# Altium PCB NOS_EEG_V2.PcbDoc
Units mil, origin at the board's own origin, x right, y up, seen from the top; angles counter-clockwise.
Board outline 3700 x 2300 mil, 2 copper layers (Top Layer, Bottom Layer); 44 components, 35 nets, 173 pads, 14 vias.
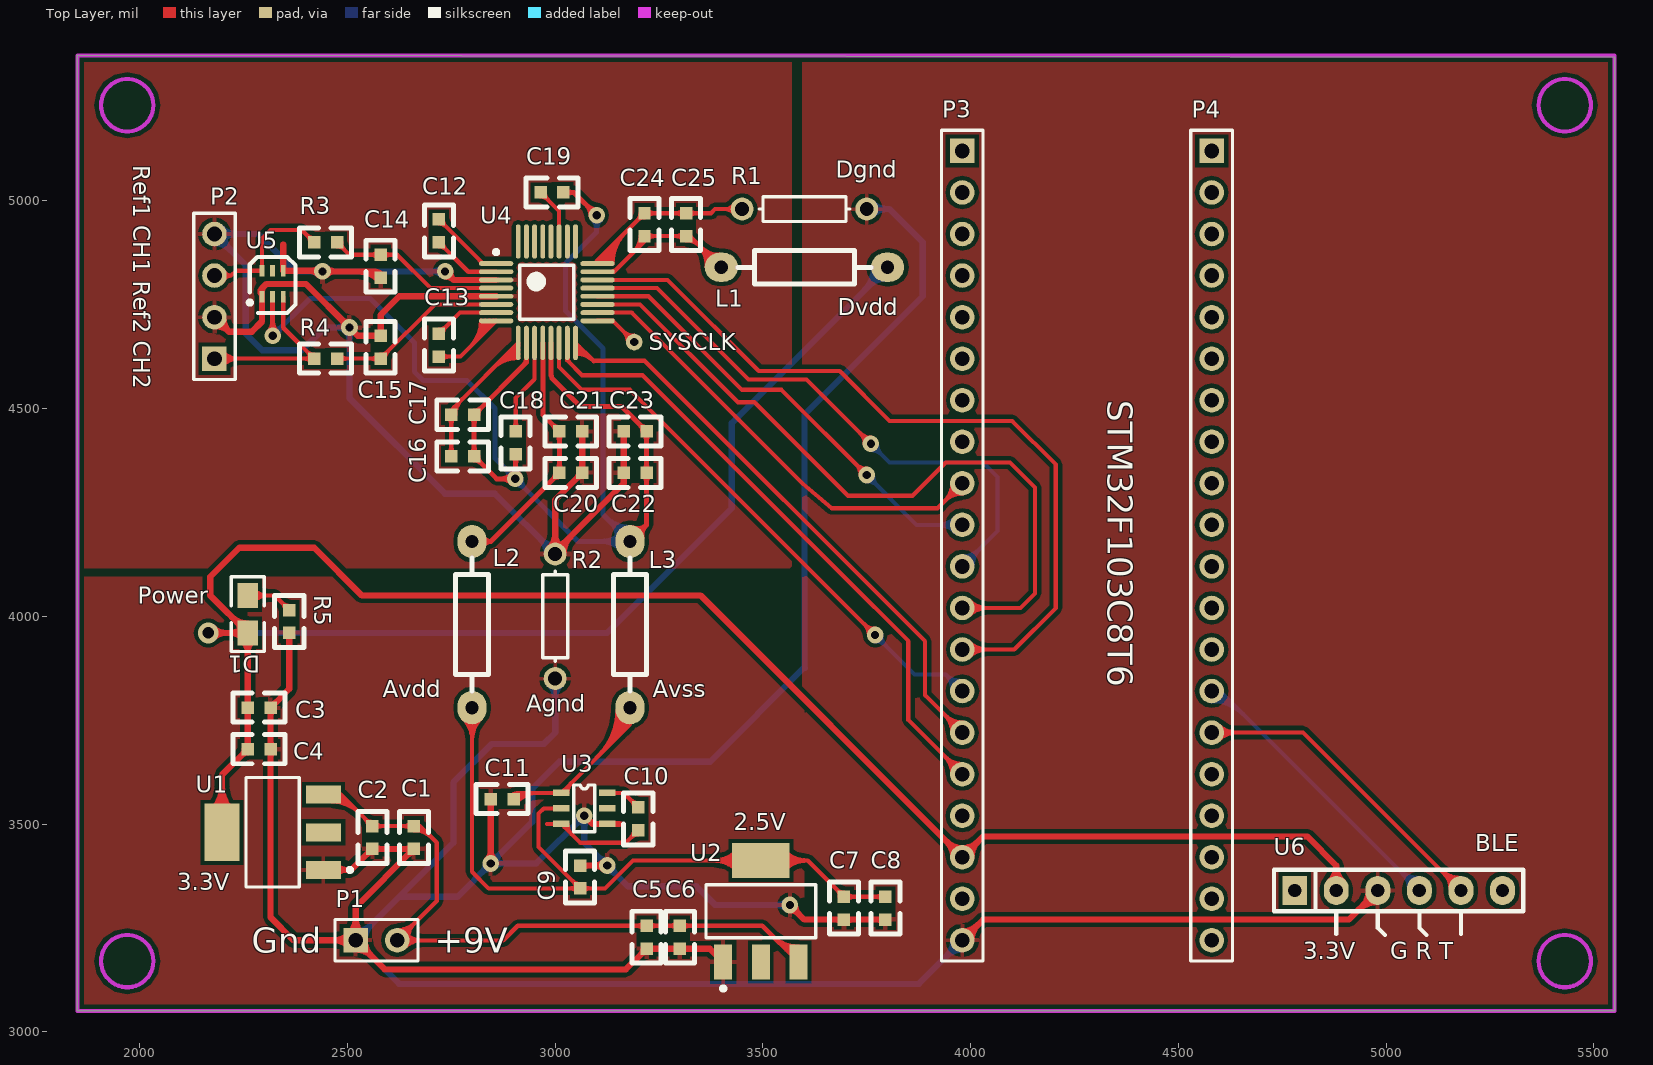
[diagram p0: Top Layer view]
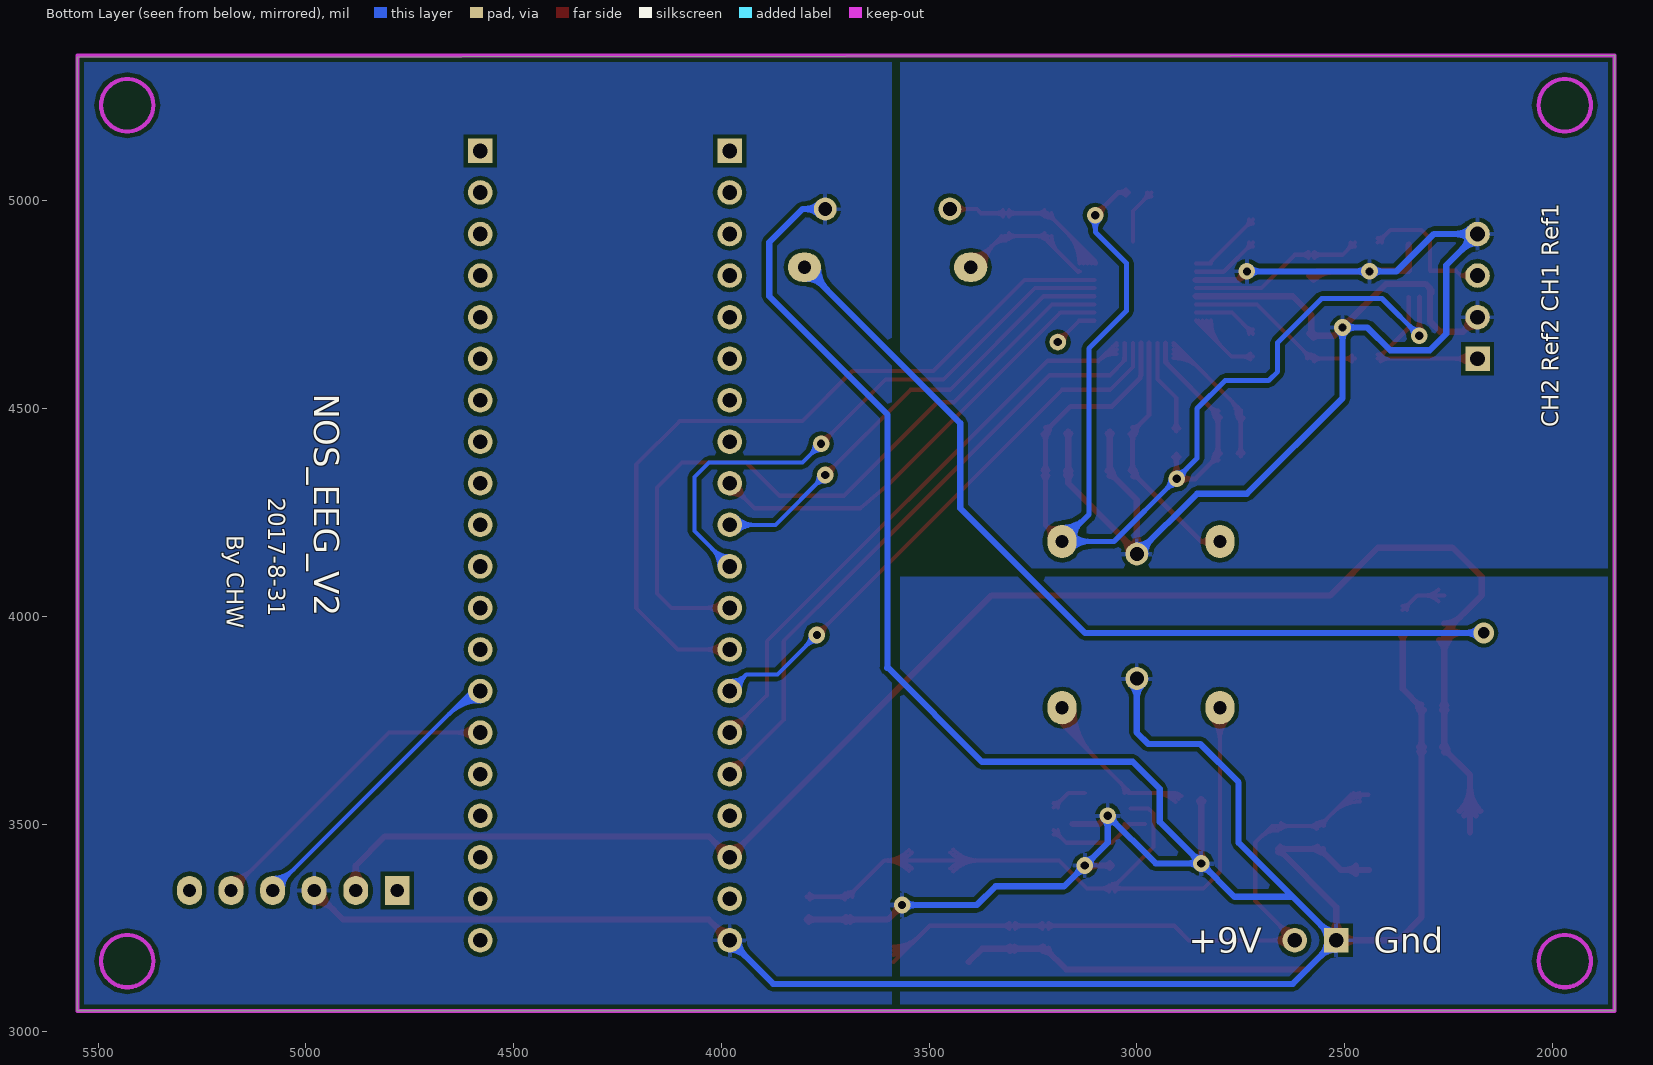
[diagram p1: Bottom Layer view, seen from below]

## Layer stack, top to bottom
Top Layer: signal copper 1.4
Dielectric: prepreg 12.6, FR-4, Dk 4.8
Bottom Layer: signal copper 1.4

## Board outline
5550,5345 5550,3050 1850,3050 1850,5350

## Design rules (kind name [scope] priority, off if disabled: settings)
Clearance [All] p1: gap=6
DiffPairsRouting [All] p1: maxlimit=15 minlimit=6 mostfreqgap=10 maxuncoupledlength=500
PolygonConnect [All] p1: connectstyle=Relief reliefconductorwidth=10 reliefentries=4 polygonreliefangle="90 Angle"
RoutingVias [All] p1: holewidth=25 width=40 viastyle="Through Hole" minholewidth=28 minwidth=50 maxholewidth=28 maxwidth=50
SolderMaskExpansion [All] p1: expansion=4
TestPointUsage [All] p1: valid=0 allowmultiple=FALSE
Testpoint [All] p1: side=15 testpointundercomponent=TRUE minsize=40 maxsize=100 preferedsize=60 minholesize=0 maxholesize=40 preferedholesize=32 testpointgrid=1 style=1023 order=0123456789
Width [All] p1: maxlimit=15 minlimit=6 preferedwidth=8 minimp=50.000000 maximp=50.000000 favimp=50.000000
18 further rules are at their usual default settings.

## Components (designator, comment, footprint, x,y, rotation, side; value= is the part's Value field where it differs from the comment)
C1 "Cap" 0603 2660,3440 r90 top
C2 "Cap" 0603 2560,3440 r90 top
C3 "Cap" 0603 2260,3780 r0 top
C4 "Cap" 0603 2260,3680 r0 top
C5 "Cap" 0603 3220,3200 r90 top
C6 "Cap" 0603 3300,3200 r90 top
C7 "Cap" 0603 3695,3325 r270 top
C8 "Cap" 0603 3795,3325 r270 top
C9 "Cap" 0603 3060,3400 r270 top
C10 "Cap" 0603 3200,3540 r270 top
C11 "Cap" 0603 2900,3560 r180 top
C12 "Cap" 0603 2720,4900 r90 top
C13 "Cap" 0603 2720,4680 r270 top
C14 "Cap" 0603 2580,4870 r270 top
C15 "Cap" 0603 2580,4620 r90 top
C16 "Cap" 0603 2805,4385 r180 top
C17 "Cap" 0603 2805,4485 r180 top
C18 "Cap" 0603 2905,4445 r270 top
C19 "Cap" 0603 3020,5020 r180 top
C20 "Cap" 0603 3065,4345 r180 top
C21 "Cap" 0603 3065,4445 r180 top
C22 "Cap" 0603 3165,4345 r0 top
C23 "Cap" 0603 3165,4445 r0 top
C24 "Cap" 0603 3215,4970 r270 top
C25 "Cap" 0603 3315,4970 r270 top
D1 "LED" 0805 2260,3960 r90 top
L1 "Inductor" AXIAL0.4 3600,4840 r180 top
L2 "Inductor" AXIAL0.4 2800,3980 r90 top
L3 "Inductor" AXIAL0.4 3180,3980 r90 top
P1 "BAT-POWER" HDR1X2 2520,3220 r0 top
P2 "INPUT" HDR1X4 2180,4620 r90 top
P3 "LEFT" HDR1X20 3980,5120 r270 top
P4 "RIGHT" HDR1X20 4580,5120 r270 top
R1 "Res1" AXIAL-0.3 3600,4980 r180 top
R2 "Res1" AXIAL-0.3 3000,4000 r90 top
R3 "Res1" 0603 2420,4900 r0 top
R4 "Res1" 0603 2420,4620 r0 top
R5 "Res1" 0603 2360,3960 r90 top
U1 "AMS1117 - 3.3V" SOT223 2320,3480 r90 top
U2 "AMS1117 - 2.5V" SOT223 3495,3290 r0 top
U3 "TPS60403" SOT23-5 3015,3575 r0 top
U4 "ADS1292" PBS32_M 2980,4780 r0 top
U5 "SMF05C" INF-SOT363_V 2320,4800 r90 top
U6 "HC-08" SIP6 4780,3340 r0 top

## Footprints (in the part's own frame and the unit in brackets; to place one, negate y for a bottom-side part, rotate by r counter-clockwise, add the part's x,y. Pads: shape width x height; smd on the part's side, far side on the other; paste and mask are expansions set on the pad)
0603 [mil]
  rect 30x30 smd: 1(0,0) 2(55,0)
  silkscreen extent -35,-35 90,35
0805 [mil]
  rect 60x50 smd: 1(0,0) 2(90,0)
  silkscreen extent -45,-40 135,40
AXIAL0.4 [mil]
  oval 80x70 hole 32: 1(-200,0) 2(200,0)
  silkscreen extent -160,-40 160,40
AXIAL-0.3 [mm] "Resistor; 2 Leads"
  round 1.4 hole 0.85: 1(-3.81,0) 2(3.81,0)
  silkscreen extent -2.77,-0.76 2.77,0.76
HDR1X2 [mm] "Connector; Header; 2 Position"
  rect 1.5x1.5 hole 0.9: 1(0,0)
  round 1.5 hole 0.9: 2(2.54,0)
  silkscreen extent -1.27,-1.27 3.81,1.27
HDR1X4 [mm] "Connector; Header; 4 Position"
  rect 1.5x1.5 hole 0.9: 1(0,0)
  round 1.5 hole 0.9: 2(2.54,0) 3(5.08,0) 4(7.62,0)
  silkscreen extent -1.27,-1.27 8.89,1.27
HDR1X20 [mm] "Connector; Header; 20 Position"
  rect 1.5x1.5 hole 0.9: 1(0,0)
  round 1.5 hole 0.9: 2(2.54,0) 3(5.08,0) 4(7.62,0) 5(10.16,0) 6(12.7,0) 7(15.24,0) 8(17.78,0) 9(20.32,0) 10(22.86,0) 11(25.4,0) 12(27.94,0) 13(30.48,0) 14(33.02,0) 15(35.56,0) 16(38.1,0) 17(40.64,0) 18(43.18,0) 19(45.72,0) 20(48.26,0)
  silkscreen extent -1.27,-1.27 49.53,1.27
INF-SOT363_V [mm] "SOT23, 6-Leads, Body 2x1.25 mm, Pitch 0.65 mm"
  rect 0.7x0.3 smd: 1(-0.8,0.65) 2(-0.8,0) 3(-0.8,-0.65) 4(0.8,-0.65) 5(0.8,0) 6(0.8,0.65)
  silkscreen extent -1.27,1.27 -1.02,1.52, body extent -0.63,-1 0.63,1, height 1
PBS32_M [mm] "32-Pin Thin Plastic Quad Flat Pack 0.5 mm Pitch, IPC Low Density"
  oval 2.1x0.3 smd: 1(-3.1,1.75) 2(-3.1,1.25) 3(-3.1,0.75) 4(-3.1,0.25) 5(-3.1,-0.25) 6(-3.1,-0.75) 7(-3.1,-1.25) 8(-3.1,-1.75) 17(3.1,-1.75) 18(3.1,-1.25) 19(3.1,-0.75) 20(3.1,-0.25) 21(3.1,0.25) 22(3.1,0.75) 23(3.1,1.25) 24(3.1,1.75)
  oval 0.3x2.1 smd: 9(-1.75,-3.1) 10(-1.25,-3.1) 11(-0.75,-3.1) 12(-0.25,-3.1) 13(0.25,-3.1) 14(0.75,-3.1) 15(1.25,-3.1) 16(1.75,-3.1) 25(1.75,3.1) 26(1.25,3.1) 27(0.75,3.1) 28(0.25,3.1) 29(-0.25,3.1) 30(-0.75,3.1) 31(-1.25,3.1) 32(-1.75,3.1)
  silkscreen extent -3.22,-1.65 1.65,2.57, body extent -2.5,-2.5 2.5,2.5, height 1.2
SIP6 [mil]
  rect 60x70 hole 32: 1(0,0)
  oval 60x70 hole 32: 2(100,0) 3(200,0) 4(300,0) 5(400,0) 6(500,0)
  silkscreen extent -50,-50 550,50
SOT23-5 [mm]
  rect 1x0.4 smd: 1(0,0) 2(0,-0.95) 3(0,-1.9) 4(2.8,-1.9) 5(2.8,-0.95) 6(2.8,0)
  silkscreen extent 0.76,-2.38 2.03,0.48
SOT223 [mm] "SOT-223/SC-73; 4 Leads; Body 6.7 x 7.3 mm, inc. leads (LxW max)"
  rect 1.1x2.15 smd: 1(-2.3,-3.1) 2(0,-3.1) 3(2.3,-3.1)
  rect 3.5x2.15 smd: 4(0,3.1)
  silkscreen extent -3.35,-4.85 3.35,1.63

## Part data
C1 C2 C3 C4 C5 C6 C7 C8 C9 C10 C11 C12 C13 C14 C15 C16 C17 C18 C19 C20 C21 C22 C23 C24 C25: "Capacitor"
D1: library part LED3, "Typical BLUE SiC LED"
P1: library part "Header 2", "Header, 2-Pin"
P2: library part "Header 4", "Header, 4-Pin"
P3 P4: library part "Header 20", "Header, 20-Pin"
R1 R2 R3 R4 R5: "Resistor"
U1 U2: library part AMS1117, "AMS1117"
U6: library part HC-05, "bluetooth"

## Free pads (board coordinates)
  round 40 hole 20: 0(3190,4660)

## Via types
v1: diameter 40, hole 20, Top Layer to Bottom Layer, 13 vias
v2: diameter 50, hole 28, Top Layer to Bottom Layer, 1 vias

## Nets (pads, with @x,y where several pads share a name; then routed paths per layer and width w, separated by ;. In a path a pad name is that pad's centre, name@x,y a point inside that pad or via, vN(x,y) a via of type N, cw(c..) or ccw(c..) an arc to the next point about the centre after c; other vN are vias at no path point)
+2.5V: C7.1 C8.1 C9.2 L2.1 U2.4 U3.2 | length 2644
  Top Layer w10: L2.1@2778.79,3753.79 cw(c2727.57,3702.57) 2800,3702.57 cw(c2872.43,3702.57) L2.1@2821.21,3753.79 ; L2.1@2785.86,3760.86 cw(c2751.72,3726.72) 2800,3726.72 cw(c2848.28,3726.72) L2.1@2814.14,3760.86 ; L2.1 2800,3385 2840,3345 C9.2 ; U3.2 2972.6,3537.6 2960,3525 2960,3445 C9.2 ; C9.2@3050,3345 ccw(c3025.86,3345) 3042.93,3362.07 ccw(c3060,3379.14) C9.2@3060,3355 ; C9.2@3052.93,3337.93 ccw(c3035.86,3320.86) 3035.86,3345 ccw(c3035.86,3369.14) C9.2@3052.93,3352.07 ; C9.2@3067.07,3337.93 cw(c3084.14,3320.86) 3084.14,3345 cw(c3084.14,3369.14) C9.2@3067.07,3352.07 ; U2.4@3442.03,3385.66 ccw(c3378.32,3321.94) 3378.32,3412.05 ccw(c3378.32,3502.15) U2.4@3442.03,3438.44 ; U2.4@3449.11,3392.73 ccw(c3402.46,3346.08) 3402.46,3412.05 ccw(c3402.46,3478.01) U2.4@3449.11,3431.37 ; U2.4@3541.47,3393.32 cw(c3584.81,3352.54) 3584.81,3412.05 cw(c3584.81,3471.55) U2.4@3541.47,3430.77 ; U2.4@3548.75,3386.47 cw(c3607.95,3330.76) 3607.95,3412.05 ; U2.4@3548.75,3437.63 ccw(c3607.95,3493.33) 3607.95,3412.05 ; C7.1@3685,3325 ccw(c3660.86,3325) 3677.93,3342.07 ccw(c3695,3359.14) C7.1@3695,3335 ; C7.1@3702.07,3317.93 cw(c3719.14,3300.86) 3719.14,3325 cw(c3719.14,3349.14) C7.1@3702.07,3332.07 ; C8.1@3787.93,3317.93 ccw(c3770.86,3300.86) 3770.86,3325 ccw(c3770.86,3349.14) C8.1@3787.93,3332.07 ; C8.1 C7.1 3607.95,3412.05 ; C9.2 3120,3345 3187.05,3412.05 U2.4 3607.95,3412.05
+3.3V: C3.1 C4.1 D1.1 L1.1 P3.18 U1.4 U6.2 | length 7107.5
  Top Layer w15: v2(2165,3960) D1.1 ; U1.4@2173.33,3531.2 ccw(c2113.88,3590.64) 2197.95,3590.64 ccw(c2282.02,3590.64) U1.4@2222.58,3531.2 ; v2@2177.37,3947.63 cw(c2207.25,3917.75) 2207.25,3960 cw(c2207.25,4002.25) v2@2177.37,3972.37 ; U1.4@2183.94,3520.59 ccw(c2150.1,3554.43) 2197.95,3554.43 ccw(c2245.81,3554.43) U1.4@2211.97,3520.59 ; U1.4 2197.95,3617.95 C4.1 C3.1 D1.1 ; 2221.59,3998.41 ccw(c2260,4036.82) D1.1@2260,3982.5 ; 2233.66,3986.34 cw(c2212.32,3965) D1.1@2242.5,3965 ; D1.1@2247.63,3942.63 cw(c2217.75,3912.75) 2260,3912.75 cw(c2302.25,3912.75) D1.1@2272.37,3942.63 ; D1.1@2247.63,3947.63 ccw(c2217.75,3917.75) 2217.75,3960 ccw(c2217.75,4002.25) D1.1@2247.63,3972.37 ; C4.1@2252.5,3680 cw(c2234.39,3680) 2247.2,3667.2 cw(c2260,3654.39) C4.1@2260,3672.5 ; C4.1@2254.7,3685.3 ccw(c2241.89,3698.11) 2260,3698.11 ccw(c2278.11,3698.11) C4.1@2265.3,3685.3 ; C3.1@2254.7,3774.7 cw(c2241.89,3761.89) 2260,3761.89 cw(c2278.11,3761.89) C3.1@2265.3,3774.7 ; C3.1@2254.7,3785.3 ccw(c2241.89,3798.11) 2260,3798.11 ccw(c2278.11,3798.11) C3.1@2265.3,3785.3 ; P3.18@3957.97,3420 ccw(c3904.79,3420) 3942.4,3457.6 ccw(c3980,3495.21) 3980,3442.03 ccw(c3980,3495.21) 4017.6,3457.6 ccw(c4055.21,3420) P3.18@4002.03,3420 ; U6.2@4864.09,3360.91 ccw(c4825.68,3399.32) 4880,3399.32 ccw(c4934.32,3399.32) U6.2@4895.91,3360.91 ; U6.2 4880,3400 4810,3470 4030,3470 P3.18 3350,4050 2535,4050 2420,4165 2240,4165 2170,4095 2170,4050 D1.1
  Bottom Layer w15: v2(2165,3960) 3125,3960 3425,4260 3425,4465 L1.1 L1.1@3785,4840 ; v2@2177.37,3947.63 cw(c2207.25,3917.75) 2207.25,3960 cw(c2207.25,4002.25) v2@2177.37,3972.37 ; 3744.52,4784.52 ccw(c3689.04,4840) L1.1@3767.5,4840 ; 3756.59,4796.59 cw(c3795,4758.18) L1.1@3795,4812.5 ; 3770.13,4810.13 ccw(c3740.25,4840) L1.1@3782.5,4840
+9V: C1.2 C2.2 C5.2 C6.2 P1.2 U1.3 U2.3 | length 2581
  Top Layer w10: U1.3 2484.45,3570.55 ; U1.3@2462.72,3553.9 cw(c2462.72,3461.23) 2528.25,3526.76 ; U1.3@2462.72,3563.9 cw(c2462.72,3495.37) 2511.17,3543.83 ; U1.3@2462.72,3573.9 cw(c2462.72,3529.51) 2494.1,3560.9 ; U1.3@2478.8,3566.22 cw(c2484.45,3564.7) 2484.45,3570.55 ; U1.3@2478.8,3574.88 ccw(c2484.45,3576.4) 2484.45,3570.55 ; C2.2@2550,3495 ccw(c2525.86,3495) 2542.93,3512.07 ccw(c2560,3529.14) C2.2@2560,3505 ; C2.2@2567.07,3487.93 cw(c2584.14,3470.86) 2584.14,3495 cw(c2584.14,3519.14) C2.2@2567.07,3502.07 ; P1.2@2620,3234.53 ccw(c2620,3269.6) 2644.8,3244.8 ccw(c2669.6,3220) P1.2@2634.53,3220 ; P1.2@2620,3244.53 ccw(c2620,3303.74) 2661.87,3261.87 ccw(c2703.74,3220) P1.2@2644.53,3220 ; P1.2@2630.27,3209.73 cw(c2655.07,3184.93) 2655.07,3220 cw(c2655.07,3255.07) P1.2@2630.27,3230.27 ; P1.2@2637.34,3202.66 cw(c2679.21,3160.79) 2679.21,3220 cw(c2679.21,3279.21) P1.2@2637.34,3237.34 ; C1.2@2652.93,3487.93 ccw(c2635.86,3470.86) 2635.86,3495 ccw(c2635.86,3519.14) C1.2@2652.93,3502.07 ; C1.2@2660,3485 cw(c2660,3424.64) 2702.68,3467.32 ; 2685.61,3484.39 ccw(c2660,3458.79) C1.2 ; C5.2@3212.93,3247.93 ccw(c3195.86,3230.86) 3195.86,3255 ccw(c3195.86,3279.14) C5.2@3212.93,3262.07 ; C5.2@3227.07,3247.93 cw(c3244.14,3230.86) 3244.14,3255 cw(c3244.14,3279.14) C5.2@3227.07,3262.07 ; C6.2@3292.93,3247.93 ccw(c3275.86,3230.86) 3275.86,3255 ccw(c3275.86,3279.14) C6.2@3292.93,3262.07 ; C6.2@3307.07,3247.93 cw(c3324.14,3230.86) 3324.14,3255 cw(c3324.14,3279.14) C6.2@3307.07,3262.07 ; 3521.84,3231.67 ccw(c3585.55,3295.38) U2.3@3585.55,3205.28 ; 3538.91,3214.6 ccw(c3585.55,3261.24) U2.3@3585.55,3195.28 ; 3555.98,3197.52 ccw(c3585.55,3227.1) U2.3@3585.55,3185.28 ; U2.3 3498.5,3255 C6.2 C5.2 2910,3255 2875,3220 P1.2 2715,3315 2715,3455 2675,3495 C1.2 ; 2484.45,3570.55 C2.2 C1.2
-2.5V: C11.1 L3.1 U3.1 | length 978.6
  Top Layer w10: C11.1@2892.93,3567.07 cw(c2912.07,3547.93) 2912.07,3575 ; C11.1@2907.07,3552.93 cw(c2960.36,3499.64) 2960.36,3575 ; 2936.21,3575 ccw(c2936.21,3523.79) C11.1 2915,3575 U3.1 3180,3740 L3.1 ; U3.1@3019.69,3575 cw(c3031,3575) 3023,3583 ; U3.1@3029.69,3575 cw(c3065.14,3575) 3040.07,3600.07 ; 3104.04,3664.04 ccw(c2993.08,3775) L3.1@3150,3775 ; 3121.11,3681.11 ccw(c3027.22,3775) L3.1@3160,3775 ; 3138.18,3698.18 ccw(c3061.36,3775) L3.1@3170,3775 ; 3155.25,3715.25 ccw(c3095.5,3775) L3.1@3180,3775 ; 3172.32,3732.32 ccw(c3129.64,3775) L3.1@3190,3775
AGND: C14.2 C15.2 C20.1 C21.1 C22.1 C23.1 P2.2 P2.4 R2.2 U4.3 U4.5 U5.1 U5.4 | length 5279.9
  Top Layer w15: P2.2 2215,4685 ; P2.2@2181.15,4698 cw(c2183.47,4653.47) 2215,4685 ; P2.2@2202,4718.85 ccw(c2246.53,4716.53) 2215,4685 ; U5.1@2292.81,4776.38 cw(c2320.43,4776.38) 2300.9,4795.9 ; U5.1@2293.09,4775.48 cw(c2302.17,4781.65) 2294.41,4789.41 ; 2345.59,4895 U5.4 2438.5,4831.5 v1(2440,4830) ; 2406.21,4831.5 cw(c2406.21,4796.21) v1@2431.16,4821.16 ; 2413.43,4831.5 ccw(c2413.43,4856.57) v1@2431.16,4838.84 ; v1@2430,4830 v1(2440,4830) ; v1@2448.84,4821.16 cw(c2470.18,4799.82) 2470.18,4830 cw(c2470.18,4860.18) v1@2448.84,4838.84 ; v1@2492.5,4695 ccw(c2462.32,4695) 2483.66,4716.34 ccw(c2505,4737.68) v1@2505,4707.5 ; 2525.68,4830 cw(c2525.68,4760.68) C14.2@2574.7,4809.7 ; 2561.89,4830 cw(c2561.89,4796.89) C14.2@2585.3,4820.3 ; C15.2@2574.7,4669.7 ccw(c2561.89,4656.89) 2561.89,4675 ccw(c2561.89,4693.11) 2574.7,4680.3 ccw(c2561.89,4693.11) 2580,4693.11 ccw(c2598.11,4693.11) C15.2@2585.3,4680.3 ; C14.2 2565,4830 v1(2440,4830) ; v1(2735,4830) 2755.47,4809.53 ; v1@2735.37,4817.51 cw(c2736.18,4790.24) 2755.47,4809.53 ; v1@2747.49,4829.63 ccw(c2774.76,4828.82) 2755.47,4809.53 ; U4.5 2624.84,4770.16 2580,4725.31 C15.2 2525,4675 v1(2505,4695) 2400,4800 2305,4800 2294.41,4789.41 ; U4.3 2755.47,4809.53 ; R2.2@2985.82,4164.18 ccw(c2951.57,4198.43) 3000,4198.43 ccw(c3048.43,4198.43) R2.2@3014.18,4164.18 ; R2.2@3000,4170.06 ccw(c3000,4206.41) 3025.71,4180.71 ; R2.2@3020.06,4150 cw(c3080.56,4150) 3037.78,4192.78 ; C20.1@3057.5,4345 cw(c3039.39,4345) 3052.2,4332.2 cw(c3065,4319.39) C20.1@3065,4337.5 ; C20.1@3059.7,4350.3 ccw(c3046.89,4363.11) 3065,4363.11 ccw(c3083.11,4363.11) C20.1@3070.3,4350.3 ; C21.1@3059.7,4439.7 cw(c3046.89,4426.89) 3065,4426.89 cw(c3083.11,4426.89) C21.1@3070.3,4439.7 ; C21.1 C20.1 3000,4280 R2.2@3000,4155 ; C22.1@3159.7,4339.7 cw(c3146.89,4326.89) 3165,4326.89 cw(c3183.11,4326.89) C22.1@3170.3,4339.7 ; C22.1@3159.7,4350.3 ccw(c3146.89,4363.11) 3165,4363.11 ccw(c3183.11,4363.11) C22.1@3170.3,4350.3 ; C23.1@3159.7,4439.7 cw(c3146.89,4426.89) 3165,4426.89 cw(c3183.11,4426.89) C23.1@3170.3,4439.7 ; C23.1 C22.1 3165,4320 R2.2@3000,4155 ; 2215,4685 2270,4685 2294.41,4709.41 U5.1 ; U5.1 2294.41,4789.41 ; U5.1 2294.41,4778.15 U5.1 ; R2.2@3000,4155 R2.2 R2.2@3000,4155
  Bottom Layer w15: P2.4@2180,4897.97 cw(c2180,4844.79) 2217.6,4882.4 cw(c2255.21,4920) P2.4@2202.03,4920 ; P2.4@2195.58,4904.42 cw(c2233.18,4866.82) 2233.18,4920 cw(c2233.18,4973.18) P2.4@2195.58,4935.58 ; v1@2431.16,4821.16 ccw(c2409.82,4799.82) 2409.82,4830 ccw(c2409.82,4860.18) v1@2431.16,4838.84 ; v1@2448.84,4821.16 cw(c2470.18,4799.82) 2470.18,4830 cw(c2470.18,4860.18) v1@2448.84,4838.84 ; v1@2496.16,4703.84 cw(c2474.82,4725.18) 2474.82,4695 cw(c2474.82,4664.82) 2496.16,4686.16 cw(c2474.82,4664.82) 2505,4664.82 cw(c2535.18,4664.82) v1@2513.84,4686.16 ; v1@2726.16,4821.16 ccw(c2704.82,4799.82) 2704.82,4830 ccw(c2704.82,4860.18) v1@2726.16,4838.84 ; v1(2735,4830) v1(2440,4830) 2375,4830 2285,4920 P2.4 2255,4845 2255,4680 2295,4640 2390,4640 2445,4695 v1(2505,4695) 2505,4525 2735,4295 2855,4295 R2.2 ; R2.2@2979.94,4150 ccw(c2931.51,4150) 2965.76,4184.24 ccw(c3000,4218.49) R2.2@3000,4170.06 ; R2.2@2995,4160 R2.2@3005,4160
AVDD: C20.2 C21.2 L2.2 U4.12 | length 791.1
  Top Layer w12: L2.2 2845,4180 ; L2.2@2826.41,4168.02 cw(c2845,4159.59) 2845,4180 ; L2.2@2826.41,4191.98 ccw(c2845,4200.41) 2845,4180 ; U4.12 2970.16,4484.84 C21.2 C20.2 2845,4180 ; C20.2@3001,4345 cw(c2979.27,4345) 2994.64,4329.64 cw(c3010,4314.27) C20.2@3010,4336 ; C21.2@3001,4445 ccw(c2979.27,4445) 2994.64,4460.36 ccw(c3010,4475.73) C21.2@3010,4454 ; C20.2@3003.64,4351.36 ccw(c2988.27,4366.73) 3010,4366.73 ccw(c3031.73,4366.73) C20.2@3016.36,4351.36 ; C21.2@3003.64,4438.64 cw(c2988.27,4423.27) 3010,4423.27 cw(c3031.73,4423.27) C21.2@3016.36,4438.64
AVSS: C16.1 C17.1 C18.2 C19.1 C22.2 C23.2 L3.2 U4.10 U4.13 U5.2 | length 4671.1
  Top Layer w12: v1@2310.1,4684.9 ccw(c2286.2,4708.8) 2320,4708.8 ccw(c2353.8,4708.8) v1@2329.9,4684.9 ; v1(2320,4675) U5.2 ; C16.1@2798.64,4391.36 ccw(c2783.27,4406.73) 2805,4406.73 ccw(c2826.73,4406.73) C16.1@2811.36,4391.36 ; C17.1@2798.64,4478.64 cw(c2783.27,4463.27) 2805,4463.27 cw(c2826.73,4463.27) C17.1@2811.36,4478.64 ; C16.1@2805,4376 cw(c2805,4354.27) 2820.36,4369.64 cw(c2835.73,4385) C16.1@2814,4385 ; C17.1@2805,4494 ccw(c2805,4515.73) 2820.36,4500.36 ccw(c2835.73,4485) C17.1@2814,4485 ; C16.1@2810,4390 C16.1 ; v1@2894.17,4321.03 ccw(c2870.27,4297.13) 2870.27,4330.93 ccw(c2870.27,4364.73) 2894.17,4340.83 ccw(c2868.01,4366.99) 2905,4366.99 ; C18.2@2898.64,4383.64 cw(c2883.27,4368.27) 2905,4368.27 cw(c2926.73,4368.27) C18.2@2911.36,4383.64 ; 2905,4362.48 ccw(c2935.61,4362.48) v1@2913.97,4340.83 ; C18.2 2905,4331.87 v1(2904.07,4330.93) 2859.07,4330.93 C16.1 ; 2922.65,4602.65 ccw(c2902.79,4622.52) U4.10@2930.88,4622.52 ; U4.10 2930.79,4610.79 C17.1 C16.1 ; U4.13@2990,4658.11 U4.13 2989.84,4580.43 2992.88,4572.12 3060,4505 3160,4505 C23.2 C22.2 3220,4220 ; C19.1 3045,5020 v1(3100,4965) ; C19.1@3026.36,5013.64 cw(c3041.73,4998.27) 3041.73,5020 cw(c3041.73,5041.73) C19.1@3026.36,5026.36 ; v1@3086,4965 ccw(c3052.2,4965) 3076.1,4988.9 ccw(c3100,5012.8) v1@3100,4979 ; L3.2 3220,4220 ; L3.2@3188.99,4212.57 ccw(c3198.44,4241.56) 3220,4220 ; L3.2@3208.82,4188.18 cw(c3247.54,4192.46) 3220,4220 ; C23.2@3211,4445 ccw(c3189.27,4445) 3204.64,4460.36 ccw(c3220,4475.73) C23.2@3220,4454 ; C22.2@3213.64,4338.64 cw(c3198.27,4323.27) 3220,4323.27 cw(c3241.73,4323.27) C22.2@3226.36,4338.64 ; C22.2@3213.64,4351.36 ccw(c3198.27,4366.73) 3220,4366.73 ccw(c3241.73,4366.73) C22.2@3226.36,4351.36 ; C23.2@3213.64,4438.64 cw(c3198.27,4423.27) 3220,4423.27 cw(c3241.73,4423.27) C23.2@3226.36,4438.64
  Bottom Layer w12: v1(2320,4675) 2410,4765 2417.5,4765 2555,4765 2661.12,4658.88 2661.12,4588.88 2682.5,4567.5 2787.5,4567.5 2855,4500 2855,4380 v1(2904.07,4330.93) 3055,4180 L3.2 3115,4245 3115,4645 3025,4735 3025,4850 3100,4925 v1(3100,4965) ; v1@2320,4689 ccw(c2320,4722.8) 2343.9,4698.9 ccw(c2367.8,4675) v1@2334,4675 ; v1@2890.07,4330.93 ccw(c2856.27,4330.93) 2880.17,4354.83 ccw(c2904.07,4378.73) v1@2904.07,4344.93 ; v1@2904.07,4316.93 cw(c2904.07,4283.13) 2927.97,4307.03 cw(c2951.87,4330.93) v1@2918.07,4330.93 ; v1@3090.1,4955.1 cw(c3066.2,4931.2) 3100,4931.2 cw(c3133.8,4931.2) v1@3109.9,4955.1 ; 3121.96,4238.04 ccw(c3180,4296.08) L3.2@3180,4214 ; 3134.03,4225.97 cw(c3093.06,4185) L3.2@3151,4185 ; 3142.44,4217.56 ccw(c3180,4255.11) L3.2@3180,4202 ; L3.2@3159.49,4159.49 ccw(c3109.99,4109.99) 3109.99,4180 ccw(c3109.99,4250.01) L3.2@3159.49,4200.51 ; L3.2@3167.98,4167.98 ccw(c3138.96,4138.96) 3138.96,4180 ccw(c3138.96,4221.04) L3.2@3167.98,4192.02
CH1: P2.3 R3.1 U5.6 | length 436
  Top Layer w10: P2.3 2220,4820 ; P2.3@2201.86,4808.88 cw(c2220,4799.65) 2220,4820 ; P2.3@2201.86,4831.12 ccw(c2220,4840.35) 2220,4820 ; U5.6@2294.41,4841.15 U5.6 ; R3.1@2410,4900 ccw(c2385.86,4900) 2402.93,4917.07 ccw(c2420,4934.14) R3.1@2420,4910 ; R3.1 2390,4930 2315,4930 2294.41,4909.41 U5.6 ; 2220,4820 2231.5,4831.5 U5.6
CH2: P2.1 R4.1 U5.3 | length 643.3
  Top Layer w10: P2.1 R4.1 2345.59,4694.41 U5.3 ; P2.1@2190.27,4609.73 cw(c2215.07,4584.93) 2215.07,4620 cw(c2215.07,4655.07) P2.1@2190.27,4630.27 ; P2.1@2197.34,4602.66 cw(c2239.21,4560.79) 2239.21,4620 cw(c2239.21,4679.21) P2.1@2197.34,4637.34 ; R4.1@2410,4620 ccw(c2385.86,4620) 2402.93,4637.07 ccw(c2420,4654.14) R4.1@2420,4630 ; R4.1@2412.93,4612.93 ccw(c2395.86,4595.86) 2395.86,4620 ccw(c2395.86,4644.14) R4.1@2412.93,4627.07
CLKSEL: P3.14 U4.14 | length 1603.3
  Top Layer w10: U4.14 3009.53,4600 3064.53,4545 3180,4545 v1(3770,3955) ; v1@3755,3955 ccw(c3718.79,3955) 3744.39,3980.61 ccw(c3770,4006.21) v1@3770,3970
  Bottom Layer w10: v1@3770,3940 cw(c3770,3903.79) 3795.61,3929.39 cw(c3821.21,3955) v1@3785,3955 ; v1(3770,3955) 3865,3860 3940,3860 ; P3.14@3955.49,3820.81 ccw(c3902.55,3822.55) 3940,3860 ; P3.14@3965.48,3820.48 ccw(c3934.13,3821.51) 3956.31,3843.69 ccw(c3978.49,3865.87) P3.14@3979.52,3834.52 ; P3.14@3979.19,3844.51 cw(c3977.45,3897.45) 3940,3860 ; P3.14 3940,3860
CS: P3.9 U4.18 | length 1243.1
  Top Layer w10: U4.18 3184.21,4730.79 3595.3,4319.7 3665.61,4260 3920,4260 P3.9 ; P3.9@3955.47,4320 cw(c3896.26,4320) 3938.13,4278.13 cw(c3980,4236.26) P3.9@3980,4295.47 ; P3.9@3965.47,4320 cw(c3930.4,4320) 3955.2,4295.2 cw(c3980,4270.4) P3.9@3980,4305.47
DGND: C24.1 C25.1 R1.2 U4.24 | length 840.6
  Top Layer w10: U4.24@3098.39,4848.9 cw(c3109.22,4848.9) 3101.56,4856.56 ; U4.24 3102.05,4857.05 C24.1 C25.1 3375,4970 3385,4980 R1.2 ; U4.24@3108.39,4848.9 cw(c3143.36,4848.9) 3118.63,4873.63 ; U4.24@3118.39,4848.9 cw(c3177.51,4848.9) 3135.7,4890.7 ; U4.24@3128.39,4848.9 cw(c3211.65,4848.9) 3152.77,4907.77 ; U4.24@3138.39,4848.9 cw(c3245.79,4848.9) 3169.84,4924.84 ; C24.1@3205,4970 cw(c3180.86,4970) 3197.93,4952.93 cw(c3215,4935.86) C24.1@3215,4960 ; C24.1@3222.07,4962.93 cw(c3239.14,4945.86) 3239.14,4970 cw(c3239.14,4994.14) C24.1@3222.07,4977.07 ; C25.1@3307.93,4962.93 ccw(c3290.86,4945.86) 3290.86,4970 ccw(c3290.86,4994.14) C25.1@3307.93,4977.07 ; C25.1@3322.07,4962.93 cw(c3339.14,4945.86) 3339.14,4970 cw(c3339.14,4994.14) C25.1@3322.07,4977.07 ; R1.2@3430.69,4968.33 ccw(c3410,4955.82) 3410,4980 ccw(c3410,5004.18) R1.2@3430.69,4991.67
DRDY: P3.13 U4.22 | length 2046.6
  Top Layer w10: U4.22 3270.47,4809.53 3490,4590 3685,4590 3805,4470 4100,4470 4205,4365 4205,4020 4105,3920 P3.13 ; P3.13@3990.27,3909.73 cw(c4015.07,3884.93) 4015.07,3920 cw(c4015.07,3955.07) P3.13@3990.27,3930.27 ; P3.13@3997.34,3902.66 cw(c4039.21,3860.79) 4039.21,3920 cw(c4039.21,3979.21) P3.13@3997.34,3937.34
DVDD: C24.2 C25.2 L1.2 U4.23 | length 720.6
  Top Layer w10: U4.23@3137.48,4830.12 ccw(c3137.48,4842.5) 3146.24,4833.74 ; U4.23@3141.7,4829.21 3215,4902.51 C24.2 ; 3189.1,4876.61 ccw(c3150.7,4915) C24.2@3205,4915 ; 3206.17,4893.68 ccw(c3184.84,4915) C24.2 ; C24.2@3222.07,4907.93 cw(c3239.14,4890.86) 3239.14,4915 cw(c3239.14,4939.14) C24.2@3222.07,4922.07 ; C25.2@3307.93,4907.93 ccw(c3290.86,4890.86) 3290.86,4915 ccw(c3290.86,4939.14) C25.2@3307.93,4922.07 ; C25.2@3315,4905 cw(c3315,4856.72) 3349.14,4890.86 ; C25.2@3325,4915 L1.2 ; 3332.07,4907.93 ccw(c3315,4890.86) C25.2 C24.2 ; 3340.25,4899.75 cw(c3280.5,4840) L1.2@3365,4840 ; 3352.32,4887.68 ccw(c3395,4930.36) L1.2@3395,4870 ; 3357.32,4882.68 cw(c3314.64,4840) L1.2@3375,4840 ; 3369.39,4870.61 ccw(c3395,4896.21) L1.2@3395,4860
GND: C1.1 C2.1 C3.2 C4.2 C5.1 C6.1 C7.2 C8.2 C9.1 C11.2 P1.1 P3.20 R1.1 R2.1 R5.1 U1.1 U2.1 U3.4 U6.3 | length 11821.1
  Top Layer w15: C4.2@2309.7,3674.7 cw(c2296.89,3661.89) 2315,3661.89 cw(c2333.11,3661.89) C4.2@2320.3,3674.7 ; C4.2@2309.7,3685.3 ccw(c2296.89,3698.11) 2315,3698.11 ccw(c2333.11,3698.11) C4.2@2320.3,3685.3 ; C3.2@2309.7,3774.7 cw(c2296.89,3761.89) 2315,3761.89 cw(c2333.11,3761.89) C3.2@2320.3,3774.7 ; C3.2@2315,3787.5 ccw(c2315,3805.61) 2327.8,3792.8 ccw(c2340.61,3780) C3.2@2322.5,3780 ; R5.1@2354.7,3954.7 cw(c2341.89,3941.89) 2360,3941.89 cw(c2378.11,3941.89) R5.1@2365.3,3954.7 ; R5.1 2360,3825 C3.2 C4.2 2315,3275 2370,3220 P1.1 ; U1.1 2509.45,3389.45 C2.1 C1.1 2520,3300 P1.1 ; U1.1@2472.72,3379.44 cw(c2496.89,3355.28) 2496.89,3389.45 cw(c2496.89,3423.62) U1.1@2472.72,3399.46 ; P1.1@2504.42,3204.42 ccw(c2466.82,3166.82) 2466.82,3220 ccw(c2466.82,3273.18) 2504.42,3235.58 ccw(c2466.82,3273.18) 2520,3273.18 ccw(c2573.18,3273.18) P1.1@2535.58,3235.58 ; P1.1@2520,3197.97 cw(c2520,3144.79) 2557.6,3182.4 cw(c2595.21,3220) P1.1@2542.03,3220 ; C2.1@2552.5,3440 cw(c2534.39,3440) 2547.2,3427.2 cw(c2560,3414.39) C2.1@2560,3432.5 ; C2.1@2565.3,3434.7 cw(c2578.11,3421.89) 2578.11,3440 cw(c2578.11,3458.11) C2.1@2565.3,3445.3 ; C1.1@2652.5,3440 cw(c2634.39,3440) 2647.2,3427.2 cw(c2660,3414.39) C1.1@2660,3432.5 ; C1.1@2654.7,3434.7 ccw(c2641.89,3421.89) 2641.89,3440 ccw(c2641.89,3458.11) C1.1@2654.7,3445.3 ; v1@2836.16,3413.84 ccw(c2814.82,3435.18) 2845,3435.18 ccw(c2875.18,3435.18) v1@2853.84,3413.84 ; C11.2@2839.7,3554.7 cw(c2826.89,3541.89) 2845,3541.89 cw(c2863.11,3541.89) C11.2@2850.3,3554.7 ; v1(2845,3405) C11.2 ; C9.1 v1(3125,3400) ; C9.1@3065.3,3394.7 cw(c3078.11,3381.89) 3078.11,3400 cw(c3078.11,3418.11) C9.1@3065.3,3405.3 ; v1(3070,3520) 3089.8,3500.2 U3.4 3154.8,3500.2 3155,3500 ; v1@3116.16,3391.16 ccw(c3094.82,3369.82) 3094.82,3400 ccw(c3094.82,3430.18) v1@3116.16,3408.84 ; C5.1@3212.5,3200 cw(c3194.39,3200) 3207.2,3187.2 cw(c3220,3174.39) C5.1@3220,3192.5 ; C5.1@3225.3,3194.7 cw(c3238.11,3181.89) 3238.11,3200 cw(c3238.11,3218.11) C5.1@3225.3,3205.3 ; C6.1@3294.7,3194.7 ccw(c3281.89,3181.89) 3281.89,3200 ccw(c3281.89,3218.11) C6.1@3294.7,3205.3 ; C6.1@3305.3,3194.7 cw(c3318.11,3181.89) 3318.11,3200 cw(c3318.11,3218.11) C6.1@3305.3,3205.3 ; U2.1 3372.4,3200 C6.1 C5.1 3170,3150 2590,3150 P1.1 ; v1@3565,3292.5 cw(c3565,3262.32) 3586.34,3283.66 cw(c3607.68,3305) v1@3577.5,3305 ; v1(3565,3305) 3600,3270 C7.2 C8.2 ; C7.2@3689.7,3264.7 ccw(c3676.89,3251.89) 3676.89,3270 ccw(c3676.89,3288.11) C7.2@3689.7,3275.3 ; C7.2@3700.3,3264.7 cw(c3713.11,3251.89) 3713.11,3270 cw(c3713.11,3288.11) C7.2@3700.3,3275.3 ; C8.2@3789.7,3264.7 ccw(c3776.89,3251.89) 3776.89,3270 ccw(c3776.89,3288.11) C8.2@3789.7,3275.3 ; P3.20 4030,3270 4910,3270 U6.3 ; P3.20@3980,3242.03 ccw(c3980,3295.21) 4017.6,3257.6 ccw(c4055.21,3220) P3.20@4002.03,3220 ; 4933.05,3293.05 cw(c4980,3246.11) U6.3@4980,3312.5 ; 4945.13,3305.13 ccw(c4915.25,3335) U6.3@4957.5,3335
  Bottom Layer w15: P1.1@2517.41,3217.41 P1.1 ; P1.1@2520,3197.97 cw(c2520,3144.79) 2557.6,3182.4 cw(c2595.21,3220) 2542.03,3220 cw(c2595.21,3220) 2557.6,3257.6 cw(c2520,3295.21) P1.1@2520,3242.03 ; v1@2832.5,3405 cw(c2802.32,3405) 2823.66,3383.66 cw(c2845,3362.32) v1@2845,3392.5 ; v1@2845,3417.5 ccw(c2845,3447.68) 2866.34,3426.34 ccw(c2887.68,3405) v1@2857.5,3405 ; v1@2853.84,3396.16 cw(c2875.18,3374.82) 2875.18,3405 cw(c2875.18,3435.18) v1@2853.84,3413.84 ; R2.1@2985.82,3835.82 cw(c2951.57,3801.57) 3000,3801.57 cw(c3048.43,3801.57) R2.1@3014.18,3835.82 ; R2.1 3000,3720 2972.5,3692.5 2847.5,3692.5 2755,3600 2755,3455 2625,3325 ; v1@3057.5,3520 cw(c3027.32,3520) 3048.66,3498.66 cw(c3070,3477.32) v1@3070,3507.5 ; v1@3061.16,3511.16 cw(c3039.82,3489.82) 3070,3489.82 cw(c3100.18,3489.82) v1@3078.84,3511.16 ; v1@3112.5,3400 ccw(c3082.32,3400) 3103.66,3421.34 ccw(c3125,3442.68) v1@3125,3412.5 ; v1@3125,3387.5 cw(c3125,3357.32) 3146.34,3378.66 cw(c3167.68,3400) v1@3137.5,3400 ; v1@3556.16,3296.16 ccw(c3534.82,3274.82) 3534.82,3305 ccw(c3534.82,3335.18) v1@3556.16,3313.84 ; v1(3565,3305) 3385,3305 3340,3350 3175,3350 v1(3125,3400) 3070,3455 v1(3070,3520) 2955,3405 v1(2845,3405) ; 3601.03,3876.03 3600,3877.05 ; R1.1 3805,4980 3885,4900 3885,4770 3600,4485 3600,3877.05 ; R1.1@3764.18,4965.82 cw(c3798.43,4931.57) 3798.43,4980 cw(c3798.43,5028.43) R1.1@3764.18,4994.18 ; P3.20@3957.97,3220 cw(c3904.79,3220) 3942.4,3182.4 cw(c3980,3144.79) P3.20@3980,3197.97 ; P3.20 3875,3115 2625,3115 P1.1 ; P1.1 2625,3325 ; 2625,3325 2765,3325 v1(2845,3405) ; v1(2845,3405) 2945,3505 2945,3585 3010,3650 3372.95,3650 3600,3877.05
MISO: P3.11 U4.21 | length 1663.4
  Top Layer w10: U4.21 3245.16,4789.84 3465,4570 3605,4570 v1(3760,4415) ; v1@3745,4415 ccw(c3708.79,4415) 3734.39,4440.61 ccw(c3760,4466.21) v1@3760,4430
  Bottom Layer w10: v1@3760,4400 cw(c3760,4363.79) 3785.61,4389.39 cw(c3811.21,4415) v1@3775,4415 ; v1(3760,4415) 3805,4370 4030,4370 4065,4335 4065,4205 P3.11 ; P3.11@3980,4134.53 ccw(c3980,4169.6) 4004.8,4144.8 ccw(c4029.6,4120) P3.11@3994.53,4120 ; P3.11@3980,4144.53 ccw(c3980,4203.74) 4021.87,4161.87 ccw(c4063.74,4120) P3.11@4004.53,4120
MOSI: P3.12 U4.19 | length 1894.3
  Top Layer w10: U4.19 3204.53,4750.47 3440,4515 3480,4515 3705,4290 3860,4290 3940,4370 4095,4370 4155,4310 4155,4055 4120,4020 P3.12 ; P3.12@3990.27,4009.73 cw(c4015.07,3984.93) 4015.07,4020 cw(c4015.07,4055.07) P3.12@3990.27,4030.27 ; P3.12@3997.34,4002.66 cw(c4039.21,3960.79) 4039.21,4020 cw(c4039.21,4079.21) P3.12@3997.34,4037.34
NetC10_1: C10.1 U3.6 | length 127.2
  Top Layer w10: U3.6 3165,3575 C10.1 ; C10.1@3190,3540 ccw(c3165.86,3540) 3182.93,3557.07 ccw(c3200,3574.14) C10.1@3200,3550
NetC10_2: C10.2 U3.3 | length 325.9
  Top Layer w10: 2980,3500 2980.2,3500.2 U3.3 3060.2,3455 3170,3455 C10.2 ; U3.3@3019.69,3500.2 ccw(c3031,3500.2) 3023,3492.2 ; U3.3@3029.69,3500.2 ccw(c3065.14,3500.2) 3040.07,3475.13 ; C10.2@3190,3485 cw(c3165.86,3485) 3182.93,3467.93 cw(c3200,3450.86) C10.2@3200,3475
NetC12_1: C12.1 U4.2 | length 205.2
  Top Layer w10: C12.1@2720,4890 cw(c2720,4865.86) 2737.07,4882.93 cw(c2754.14,4900) C12.1@2730,4900 ; C12.1 2790.79,4829.21 U4.2
NetC12_2: C12.2 U4.1 | length 228.3
  Top Layer w10: C12.2@2720,4945 cw(c2720,4920.86) 2737.07,4937.93 cw(c2754.14,4955) C12.2@2730,4955 ; C12.2 2826.1,4848.9 U4.1 ; 2818.44,4856.56 cw(c2810.78,4848.9) U4.1@2821.61,4848.9
NetC13_1: C13.1 U4.7 | length 196.9
  Top Layer w10: C13.1 2770.79,4730.79 U4.7 ; C13.1@2720,4690 ccw(c2720,4714.14) 2737.07,4697.07 ccw(c2754.14,4680) C13.1@2730,4680
NetC13_2: C13.2 U4.8 | length 373.4
  Top Layer w10: C13.2 2771.85,4625 U4.8 ; C13.2@2727.07,4617.93 cw(c2744.14,4600.86) 2744.14,4625 cw(c2744.14,4649.14) C13.2@2727.07,4632.07 ; 2795.92,4649.07 ccw(c2733.89,4711.1) U4.8@2821.61,4711.1 ; 2812.99,4666.14 ccw(c2768.03,4711.1) U4.8@2831.61,4711.1 ; 2830.06,4683.21 ccw(c2802.17,4711.1) U4.8@2841.61,4711.1 ; 2847.13,4700.28 ccw(c2836.31,4711.1) U4.8@2851.61,4711.1
NetC14_1: C14.1 R3.2 U4.4 | length 542.3
  Top Layer w10: R3.2@2475,4890 cw(c2475,4865.86) 2492.07,4882.93 cw(c2509.14,4900) R3.2@2485,4900 ; R3.2 2505,4870 C14.1 2620,4870 2700.16,4789.84 U4.4 ; C14.1@2572.93,4862.93 ccw(c2555.86,4845.86) 2555.86,4870 ccw(c2555.86,4894.14) C14.1@2572.93,4877.07 ; C14.1@2587.07,4862.93 cw(c2604.14,4845.86) 2604.14,4870 cw(c2604.14,4894.14) C14.1@2587.07,4877.07
NetC15_1: C15.1 R4.2 U4.6 | length 550.8
  Top Layer w10: R4.2 C15.1 2710.47,4750.47 U4.6 ; R4.2@2482.07,4612.93 cw(c2499.14,4595.86) 2499.14,4620 cw(c2499.14,4644.14) R4.2@2482.07,4627.07 ; C15.1@2572.93,4612.93 ccw(c2555.86,4595.86) 2555.86,4620 ccw(c2555.86,4644.14) C15.1@2572.93,4627.07 ; C15.1@2580,4630 ccw(c2580,4654.14) 2597.07,4637.07 ccw(c2614.14,4620) C15.1@2590,4620
NetC16_2: C16.2 C17.2 U4.9 | length 641.3
  Top Layer w10: C16.2@2742.93,4392.07 ccw(c2725.86,4409.14) 2750,4409.14 ccw(c2774.14,4409.14) C16.2@2757.07,4392.07 ; C17.2@2742.93,4477.93 cw(c2725.86,4460.86) 2750,4460.86 cw(c2774.14,4460.86) C17.2@2757.07,4477.93 ; C16.2 C17.2 ; 2758.38,4505.23 ccw(c2778.61,4485) C17.2 ; C17.2@2760,4485 cw(c2812.75,4485) 2775.45,4522.3 ; 2849.07,4595.92 cw(c2911.1,4533.89) U4.9@2911.1,4621.61 ; 2866.14,4612.99 cw(c2911.1,4568.03) U4.9@2911.1,4631.61 ; 2883.21,4630.06 cw(c2911.1,4602.17) U4.9@2911.1,4641.61 ; 2900.28,4647.13 cw(c2911.1,4636.31) U4.9@2911.1,4651.61 ; U4.9 2750,4496.85 C17.2
NetC18_1: C18.1 U4.11 | length 269.7
  Top Layer w10: C18.1@2897.93,4452.07 ccw(c2880.86,4469.14) 2905,4469.14 ccw(c2929.14,4469.14) C18.1@2912.07,4452.07 ; C18.1 2905,4525 2950.47,4570.47 U4.11
NetC19_2: C19.2 U4.27 | length 174.3
  Top Layer w10: C19.2@2965,5010 cw(c2965,4985.86) 2982.07,5002.93 cw(c2999.14,5020) C19.2@2975,5020 ; C19.2 3009.53,4975.47 U4.27
NetD1_2: D1.2 R5.2 | length 228.3
  Top Layer w10: D1.2 2325,4050 R5.2 ; D1.2@2274.14,4035.86 cw(c2308.28,4001.72) 2308.28,4050 cw(c2308.28,4098.28) D1.2@2274.14,4064.14 ; R5.2@2350,4015 ccw(c2325.86,4015) 2342.93,4032.07 ccw(c2360,4049.14) R5.2@2360,4025
RESET: P3.16 U4.15 | length 1679.3
  Top Layer w10: U4.15 3029.21,4615.79 3065,4580 3210,4580 3690,4100 3850,3940 3850,3750 P3.16 ; U4.15@3030.12,4622.52 ccw(c3048.56,4622.52) 3035.52,4609.48 ; P3.16@3955.47,3620 ccw(c3896.26,3620) 3938.13,3661.87 ccw(c3980,3703.74) P3.16@3980,3644.53 ; P3.16@3965.47,3620 ccw(c3930.4,3620) 3955.2,3644.8 ccw(c3980,3669.6) P3.16@3980,3634.53
RXD: P4.14 U6.4 | length 1028
  Bottom Layer w10: P4.14@4580,3795.47 cw(c4580,3687.97) 4656.01,3763.99 ; P4.14@4580,3805.47 cw(c4580,3722.12) 4638.94,3781.06 ; P4.14@4580,3815.47 cw(c4580,3756.26) 4621.87,3798.13 ; P4.14 4600,3820 U6.4 ; 5028.79,3391.21 ccw(c5080,3442.43) U6.4@5080,3370 ; 5040.86,3379.14 cw(c5006.72,3345) U6.4@5055,3345 ; 5045.86,3374.14 ccw(c5080,3408.28) U6.4@5080,3360
SCLK: P3.10 U4.20 | length 1367.7
  Top Layer w10: U4.20 3224.84,4770.16 3450,4545 3545,4545 v1(3750,4340) ; v1@3735,4340 ccw(c3698.79,4340) 3724.39,4365.61 ccw(c3750,4391.21) v1@3750,4355
  Bottom Layer w10: v1@3750,4325 cw(c3750,4288.79) 3775.61,4314.39 cw(c3801.21,4340) v1@3765,4340 ; v1(3750,4340) 3870,4220 P3.10 ; P3.10@3962.66,4202.66 ccw(c3920.79,4160.79) 3920.79,4220 ccw(c3920.79,4279.21) P3.10@3962.66,4237.34 ; P3.10@3969.73,4209.73 ccw(c3944.93,4184.93) 3944.93,4220 ccw(c3944.93,4255.07) P3.10@3969.73,4230.27
START: P3.15 U4.16 | length 1636.9
  Top Layer w10: U4.16@3048.25,4651.61 cw(c3048.6,4635.59) 3059.93,4646.92 ; U4.16@3048.47,4641.61 cw(c3049.33,4603.23) 3076.48,4630.37 ; U4.16@3048.69,4631.61 cw(c3050.05,4570.86) 3093.02,4613.83 ; U4.16 3091.85,4615 3215,4615 3890,3940 3890,3810 P3.15 ; P3.15@3955.47,3720 ccw(c3896.26,3720) 3938.13,3761.87 ccw(c3980,3803.74) P3.15@3980,3744.53 ; P3.15@3965.47,3720 ccw(c3930.4,3720) 3955.2,3744.8 ccw(c3980,3769.6) P3.15@3980,3734.53
SYSCLK: pad.0 U4.17 | length 187.9
  Top Layer w10: U4.17@3123.9,4711.1 U4.17 3138.9,4711.1 pad.0 ; pad.0@3175,4660 ccw(c3138.79,4660) 3164.39,4685.61 ccw(c3190,4711.21) pad.0@3190,4675
TXD: P4.15 U6.5 | length 1038.2
  Top Layer w10: P4.15 4800,3720 U6.5 ; P4.15@4590.27,3709.73 cw(c4615.07,3684.93) 4615.07,3720 cw(c4615.07,3755.07) P4.15@4590.27,3730.27 ; P4.15@4597.34,3702.66 cw(c4639.21,3660.79) 4639.21,3720 cw(c4639.21,3779.21) P4.15@4597.34,3737.34 ; 5128.79,3391.21 ccw(c5180,3442.43) U6.5@5180,3370 ; 5140.86,3379.14 cw(c5106.72,3345) U6.5@5155,3345 ; 5145.86,3374.14 ccw(c5180,3408.28) U6.5@5180,3360
pads on no net: P3.1 P3.2 P3.3 P3.4 P3.5 P3.6 P3.7 P3.8 P3.17 P3.19 P4.1 P4.2 P4.3 P4.4 P4.5 P4.6 P4.7 P4.8 P4.9 P4.10 P4.11 P4.12 P4.13 P4.16 P4.17 P4.18 P4.19 P4.20 U1.2 U2.2 U3.5 U4.25 U4.26 U4.28 U4.29 U4.30 U4.31 U4.32 U5.5 U6.1 U6.6

## Polygon pours and split planes (outlines as drawn)
AGND on Top Layer "Top Layer-No Net" (solid, remove dead copper, pour order 1002): 1850,5350 3570,5350 3570,4120 3565,4115 1850,4115 1850,5350
GND on Top Layer "Top Layer-No Net" (solid, remove dead copper, pour order 1001): 1850,3050 1850,4095 3600,4095 3600,3050 1850,3050
GND on Top Layer "Top Layer-No Net" (solid, remove dead copper, pour order 1000): 5550,5350 5550,3050 3595,3050 3595,5350
GND on Bottom Layer "Top Layer-No Net" (solid, remove dead copper, pour order 1005): 3595,5350 5550,5350 5550,3050 3590,3050 3590,5345 3595,5350
GND on Bottom Layer "Top Layer-No Net" (solid, remove dead copper, pour order 1004): 1865,4095 3570,4095 3570,3050 1865,3050 1865,4095
AGND on Bottom Layer "Top Layer-No Net" (solid, remove dead copper, pour order 1003): 3570,5335 3570,4115 1865,4115 1865,5335 3570,5335

## Keep-outs
Keep-Out Layer:
  circle w10: c5430,3170 r62.99
  circle w10: c5430,5230 r62.99
  circle w10: c1970,5230 r62.99
  circle w10: c1970,3170 r62.99
  lines w10: 1850,3050 1850,5350 5550,5350 5550,4775 5550,3625 5550,3050 1850,3050

## Silkscreen, mask and mechanical layers (free items; w line width, h text height)
Top Overlay:
  lines w10: 2265,4780 2265,4847.13 2282.87,4865 2355,4865 2375,4845 2375,4750 2355,4730 2285,4730 ; 4880,3235 4880,3290 ; 4980,3290 4980,3250 4997.5,3232.5 ; 5080,3290 5080,3250 5097.5,3232.5 ; 5180,3235 5180,3290
  text "Ref1 CH1 Ref2 CH2" at 1985,5085 h40 r270
  text "Dgnd" at 3675,5055 h40
  text "Dvdd" at 3680,4725 h40
  text "SYSCLK" at 3225,4640 h40
  text "STM32F103C8T6" at 4330,4520 h60 r270
  text "Power" at 1995,4030 h40
  text "Avdd" at 2585,3805 h40
  text "Avss" at 3235,3805 h40
  text "Agnd" at 2930,3770 h40
  text "2.5V" at 3430,3485 h40
  text "BLE" at 5215,3435 h40
  text "3.3V" at 2090,3340 h40
  text "Gnd" at 2270,3190 h60
  text "+9V" at 2710,3190 h60
  text "3.3V" at 4800,3175 h40
  text "G R T" at 5010,3175 h40
Bottom Overlay:
  text "NOS_EEG_V2" at 4980,4535 h60 r90
  text "CH2 Ref2 CH1 Ref1" at 1985,4455 h40 r270
  text "2017-8-31" at 5090,4285 h40 r90
  text "By CHW" at 5190,4195 h40 r90
  text "Gnd" at 2430,3190 h60
  text "+9V" at 2875,3190 h60
Mechanical 1:
  circle w10: c1970,3170 r62.99
  circle w10: c1970,5230 r62.99
  circle w10: c5430,3170 r62.99
  circle w10: c5430,5230 r62.99
  lines w10: 5330,2950 5430,2950 ; 5370,2930 5430,2950 ; 5370,2970 5430,2950 ; 5430,2940 5430,2960 ; 5430,2985 5430,3170 5710,3170 ; 5550,2940 5550,2960 ; 5550,3050 5710,3050 ; 5610,2930 5550,2950 ; 5610,2970 5550,2950 ; 5650,2950 5550,2950 ; 5725,2990 5745,3050 ; 5725,3230 5745,3170 ; 5735,3050 5755,3050 ; 5735,3170 5755,3170 ; 5745,2950 5745,3050 ; 5745,3270 5745,3170 ; 5765,2990 5745,3050 ; 5765,3230 5745,3170
  text "120 (mil)" at 5888.96,2874.07 h60 r90
  text "120 (mil)" at 5254.07,2806.04 h60
Drill Drawing:
  text ".LEGEND" at 5400,3200 h40
  text "Drill Drawing." at 5400,3100 h40

## Dimensions
1850,3050 to 1850,5350 on Mechanical 1
1850,3050 to 5550,3050 on Mechanical 1